# Altium PCB LeftBar3.PcbDoc
Units mil, origin at the board's own origin, x right, y up, seen from the top; angles counter-clockwise.
Board outline 10245 x 1400 mil, 2 copper layers (Top Layer, Bottom Layer); 8 components, 8 nets, 56 pads, 12 vias.
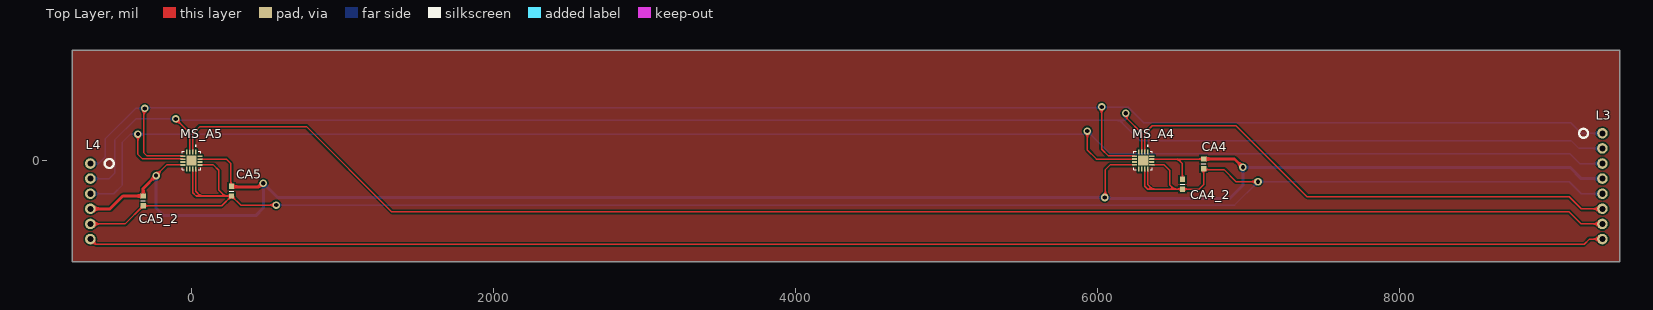
[diagram p0: Top Layer view]
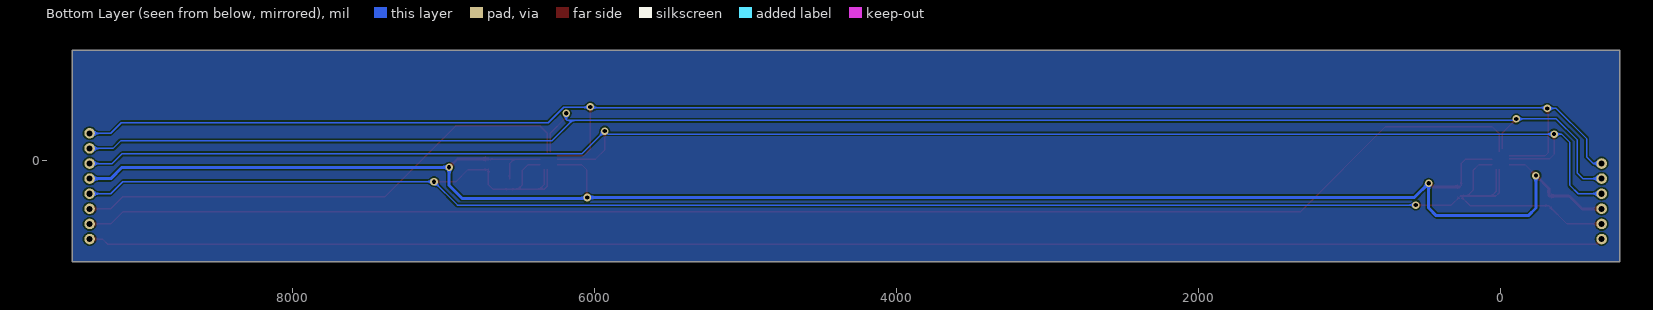
[diagram p1: Bottom Layer view, seen from below]
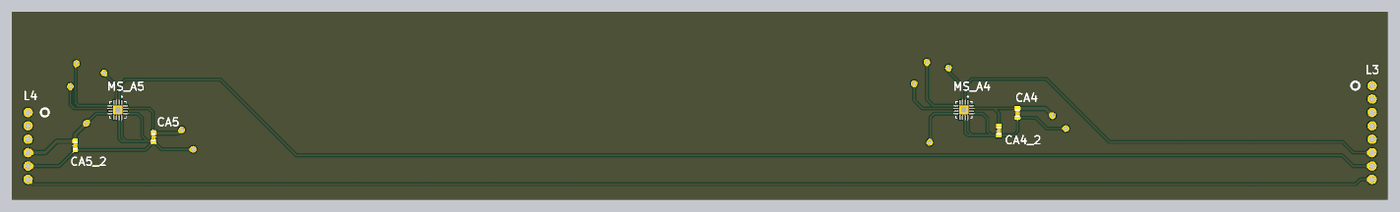
[diagram p2: 3D render of the assembled board from above, using the file's embedded part models]

## Layer stack, top to bottom
Top Solder: solder mask 0.4, Solder Resist, Dk 3.5
Top Layer: signal copper 1.4
Dielectric 1: dielectric 12.6, FR-4, Dk 4.8
Bottom Layer: signal copper 1.4
Bottom Solder: solder mask 0.4, Solder Resist, Dk 3.5

## Board outline
-790,-670 9455,-670 9455,730 -790,730

## Design rules (kind name [scope] priority, off if disabled: settings)
Clearance [All] p1: gap=10 ignorepadtopadclearanceinfootprint=FALSE except(0: Arc-Hole Track-Hole SMDPad-Hole THPad-Hole Via-Hole Fill-Hole Poly-Hole Region-Hole Text-Hole)
PolygonConnect [All] p1: connectstyle=Relief reliefconductorwidth=10 reliefentries=4 polygonreliefangle="90 Angle" airgapwidth=10
RoutingVias [All] p1: holewidth=28 width=50 viastyle="Through Hole" minholewidth=28 minwidth=50 maxholewidth=28 maxwidth=50
SolderMaskExpansion [All] p1: expansion=4 istentingtop=FALSE
Width [All] p1: maxlimit=10 minlimit=10 preferedwidth=10
30 further rules are at their usual default settings.

## Components (designator, comment, footprint, x,y, rotation, side; value= is the part's Value field where it differs from the comment)
CA4 "0.1uF" CAP_0603 6700,-22.5 r90 top
CA4_2 "0.1uF" CAP_0603 6560,-157.5 r270 top
CA5 "0.1uF" CAP_0603 265,-202.5 r90 top
CA5_2 "0.1uF" CAP_0603 -320,-267.5 r270 top
L3 "PIN_left" PIN_Left_3 9340,-320 r0 top (schematic designator CON_L_3)
L4 "PIN_left" PIN_LEFT_4 -670,-520 r0 top (schematic designator CON_L_4)
MS_A4 "MLX90393SLW ABA 011 RE" MLX90393 6300,0 r270 top
MS_A5 "MLX90393SLW ABA 011 RE" MLX90393 -1.5,-0.16 r270 top

## Footprints (in the part's own frame and the unit in brackets; to place one, negate y for a bottom-side part, rotate by r counter-clockwise, add the part's x,y. Pads: shape width x height; smd on the part's side, far side on the other; paste and mask are expansions set on the pad)
CAP_0603 [mil]
  rect 35x35 smd: 1(-32.5,0) 2(32.5,0)
  silkscreen extent 0,-16 0,14, body extent -53,-18 49,21, height 35
MLX90393 [mm]
  rrect25% 0.86x0.26 smd: 1(-1.435,0.75) 2(-1.435,0.25) 3(-1.435,-0.25) 4(-1.435,-0.75) 9(1.435,-0.75) 10(1.435,-0.25) 11(1.435,0.25) 12(1.435,0.75)
  rrect25% 0.26x0.86 smd: 5(-0.75,-1.435) 6(-0.25,-1.435) 7(0.25,-1.435) 8(0.75,-1.435) 13(0.75,1.435) 14(0.25,1.435) 15(-0.25,1.435) 16(-0.75,1.435)
  rect 1.71x1.71 smd paste-2: 17(0,0)
  silkscreen extent -2.59,-1.55 1.55,1.55
PIN_Left_3 [mil]
  round 70 hole 40: 1(0,500) 2(0,400) 3(0,300) 4(0,200) 5(0,100) 6(0,0) 7(0,-100) 8(0,-200)
  silkscreen extent -155,470 -95,530
PIN_LEFT_4 [mil]
  round 70 hole 40: 1(0,500) 2(0,400) 3(0,300) 4(0,200) 5(0,100) 6(0,0)
  silkscreen extent 95,470 155,530

## Part data
CA4 CA4_2 CA5 CA5_2: library part CAP, "Capacitance"
L3: library part PIN_left_3
L4: library part PIN_left_4
MS_A4 MS_A5: "MLX90393 Sensor"

## Via types
v1: diameter 50, hole 28, Top Layer to Bottom Layer, 12 vias

## Nets (pads, with @x,y where several pads share a name; then routed paths per layer and width w, separated by ;. In a path a pad name is that pad's centre, name@x,y a point inside that pad or via, vN(x,y) a via of type N, cw(c..) or ccw(c..) an arc to the next point about the centre after c; other vN are vias at no path point)
16: L3.8 L4.6 | length 10039
  Top Layer w10: L4.6 -635,-555 9220,-555 9255,-520 L3.8
A4: L3.6 MS_A4.2 | length 3403.5
  Top Layer w10: MS_A4.2@6310,55 6310,180 6360,230 6915,230 7385,-240 9120,-240 9200,-320 L3.6
A5: L3.7 MS_A5.2 | length 9740.3
  Top Layer w10: MS_A5.2@7.91,56.34 7.91,177.91 55,225 760,225 1325,-340 9120,-340 9200,-420 L3.7
GND: CA4.1 CA4_2.2 CA5.1 CA5_2.2 L3.5 L4.5 MS_A4.11 MS_A4.12 MS_A4.13 MS_A5.11 MS_A5.12 MS_A5.13 | length 12590.2
  Top Layer w10: L4.5 -440,-420 CA5_2.2 200,-300 CA5.1 ; MS_A5.11 8.35,-213.35 30,-235 60,-235 ; MS_A5.12 28.03,-203.03 60,-235 ; MS_A5.13 144.69,-29.69 180,-65 180,-195 220,-235 ; v1(560,-295) 325,-295 CA5.1 ; MS_A4.11 6309.84,-169.84 6330,-190 6360,-190 ; MS_A4.12 6329.53,-159.53 6360,-190 ; MS_A4.13 6439.53,-29.53 6475,-65 6475,-160 6505,-190 ; v1(7060,-140) 6915,-140 6835,-60 6705,-60 CA4.1 6700,-160 6670,-190 CA4_2.2 6505,-190 ; 60,-235 220,-235 ; 220,-235 CA5.1 ; 6360,-190 6505,-190
  Bottom Layer w10: v1(560,-295) 6905,-295 v1(7060,-140) 9120,-140 9200,-220 L3.5
MISO: L3.3 L4.3 MS_A4.6 MS_A5.6 | length 11345.7
  Top Layer w10: v1(-355,175) -355,40 -325.12,10.12 MS_A5.6@-57.99,10.12 ; v1(5930,195) 5930,70 5990.16,9.84 MS_A4.6
  Bottom Layer w10: L4.3 -515,-220 -460,-165 -460,120 -405,175 v1(-355,175) 5910,175 v1(5930,195) 6080,45 9125,45 9190,-20 L3.3
MOSI: L3.1 L4.1 MS_A4.5 MS_A5.5 | length 11387.6
  Top Layer w10: v1(-310,345) -315,340 -315,50 -295.12,30.12 MS_A5.5@-57.99,30.12 ; v1(6025,355) 6025,75 6070.04,29.96 MS_A4.5@6243.5,29.96
  Bottom Layer w10: L4.1 -615,-20 -570,25 -570,145 -370,345 v1(-310,345) -305,350 6020,350 v1(6025,355) 6027.86,352.14 6201.57,352.14 6303.71,250 9130,250 9200,180 L3.1
SCL: L3.2 L4.2 MS_A4.3 MS_A5.3 | length 11001.4
  Top Layer w10: v1(-105,275) -12.09,182.09 -12.09,78.08 ; v1(6185,312.14) 6192.65,304.49 6192.65,277.35 6289.72,180.28 MS_A4.3@6289.72,56.5
  Bottom Layer w10: L4.2 -545,-120 -510,-85 -510,135 -370,275 v1(-105,275) -97.35,267.35 -81.49,267.35 -79.14,265 6145,265 ; v1(6185,312.14) 6185,270.86 6179.14,265 6145,265 ; L3.2 9185,80 9135,130 6280,130 6145,265
VCC: CA4.2 CA4_2.1 CA5.2 CA5_2.1 L3.4 L4.4 MS_A4.8 MS_A4.15 MS_A5.8 MS_A5.15 | length 12733.1
  Top Layer w10: v1(-235,-100) -235,-99.69 -165,-29.69 MS_A5.8 ; MS_A5.15 230.32,9.68 260,-20 260,-165 CA5.2 CA5.2@270,-175 ; v1@468.43,-150 v1(475,-150) ; v1(6045,-245) 6050,-240 6050,-60 6080.47,-29.53 MS_A4.8 ; MS_A4.15 6528.17,9.84 ; CA4_2.1 6560,-21.99 6528.17,9.84 ; CA4.2 6699.84,9.84 6528.17,9.84
  Top Layer w20: L4.4 -540,-320 -455,-235 CA5_2.1 -320,-185 v1(-235,-100) ; CA5.2@270,-175 443.43,-175 v1@468.43,-150 ; CA4.2 6905,10 v1(6960,-45)
  Bottom Layer w20: v1(-235,-100) -235,-315 -185,-365 425,-365 475,-315 v1(475,-150) 570,-245 v1(6045,-245) ; v1@6055,-250 6875,-250 6960,-165 v1(6960,-45) 9125,-45 9200,-120 L3.4
pads on no net: MS_A4.1 MS_A4.4 MS_A4.7 MS_A4.9 MS_A4.10 MS_A4.14 MS_A4.16 MS_A4.17 MS_A5.1 MS_A5.4 MS_A5.7 MS_A5.9 MS_A5.10 MS_A5.14 MS_A5.16 MS_A5.17

## Polygon pours and split planes (outlines as drawn)
no net on Top Layer "NONET_L01_P005" (solid, pour order 5): -790,730 -790,-670 9455,-670 9455,730
no net on Top Layer "NONET_L01_P003" (solid, pour order 3): -805,670
no net on Top Layer "NONET_L01_P002" (solid, pour order 2): -805,670
no net on Bottom Layer "NONET_L02_P004" (solid, pour order 4): -790,730 -790,-670 9455,-670 9455,730

## Silkscreen, mask and mechanical layers (free items; w line width, h text height)
Mechanical 1:
  the board outline again, w10